# Altium PCB MB102_Upgrade.PcbDoc (part 2 of 2)
Units mil, origin at the board's own origin, x right, y up, seen from the top; angles counter-clockwise.
Board outline 2090.55 x 1299.23 mil, 2 copper layers (Top Layer, Bottom Layer), stack 65.792 mil thick; 81 components, 43 nets, 229 pads, 117 vias.
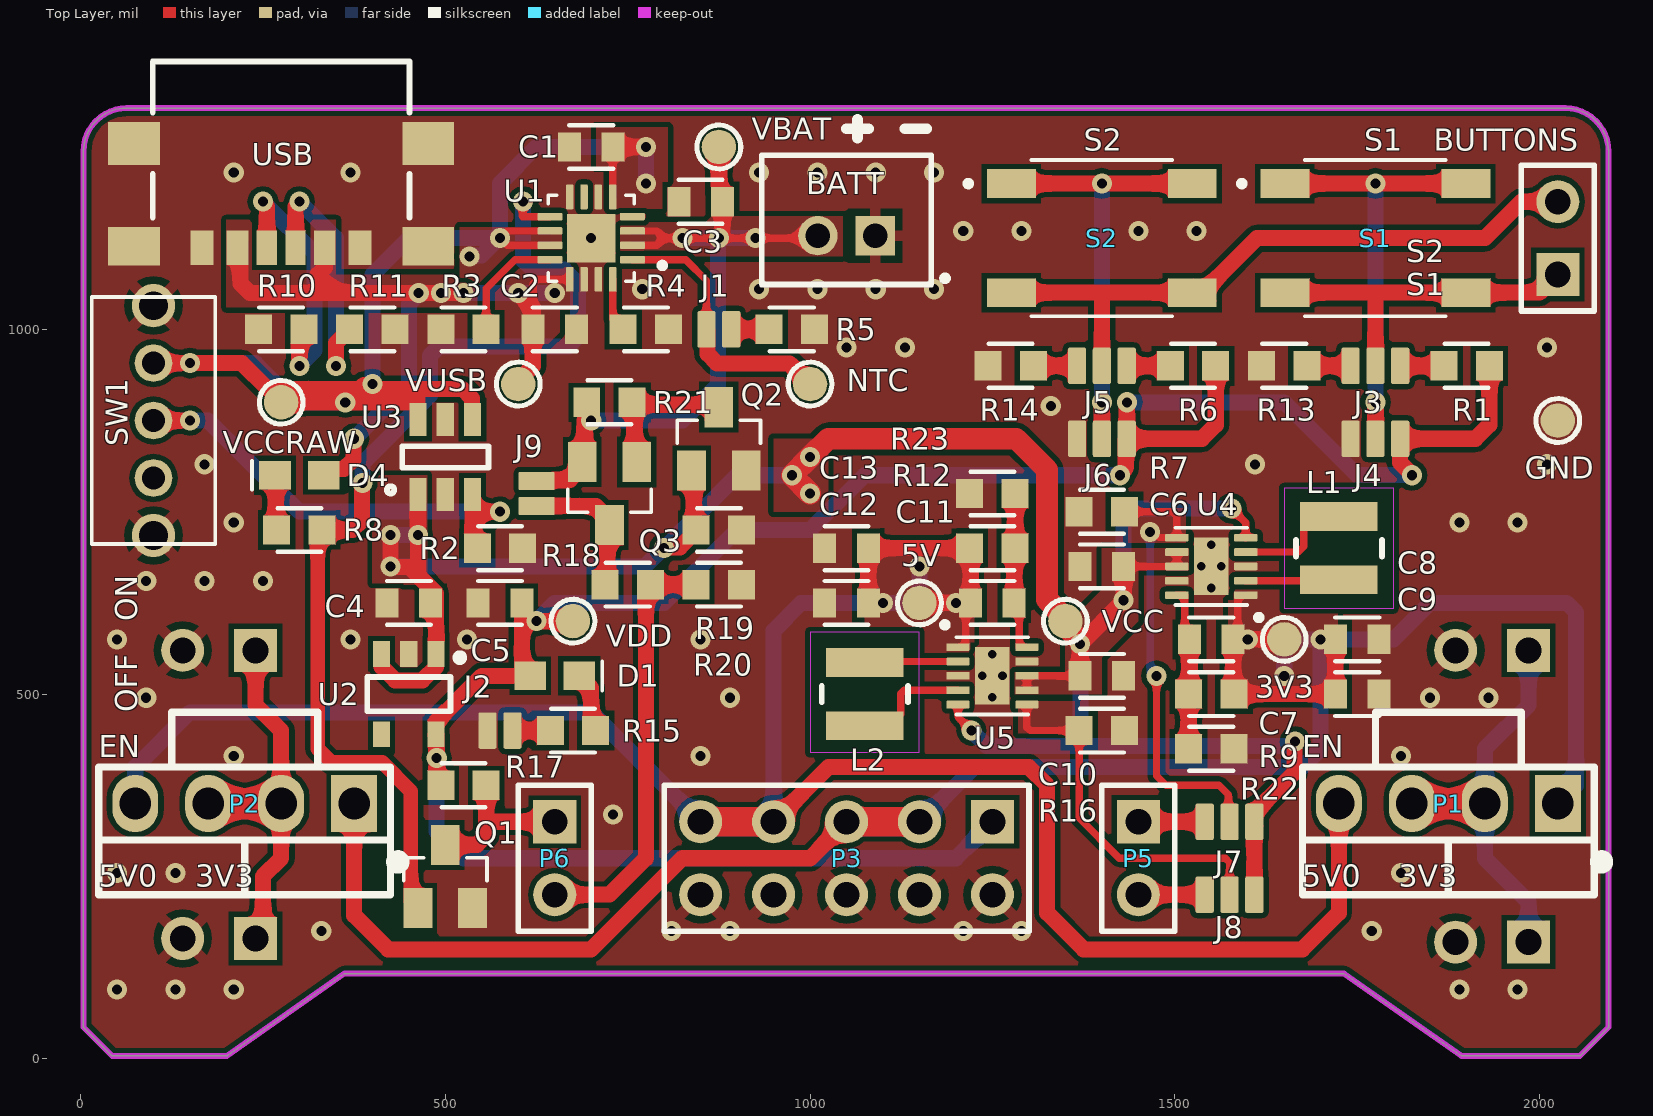
[diagram p0: Top Layer view]

## Via types
v1: diameter 27.56, hole 13.78, Top Layer to Bottom Layer, tented both sides, 109 vias
v2: diameter 19.68/19.68 (per signal layer), hole 11.81, Top Layer to Bottom Layer, 8 vias

## Nets (pads, with @x,y where several pads share a name; then routed paths per layer and width w, separated by ;. In a path a pad name is that pad's centre, name@x,y a point inside that pad or via, vN(x,y) a via of type N, cw(c..) or ccw(c..) an arc to the next point about the centre after c; other vN are vias at no path point) (continued)
VCC: (continued)
  Bottom Layer w22: v1(462.6,718.11) 462.54,718.17 425.06,718.17 v1(425,718.22) v1(425,675) 773.5,675 798.5,700 v1(800,700) 900,800 v1(975,800) ; v1(1000,775) v1(975,800) ; v1(1000,825) v1(975,800) ; v1(1221.22,450) 1242.22,429 1371,429 ; v1@1370.9,567.83 1370.9,429.1 1371,429 ; v1(1429.88,628.63) 1429.88,741.64 1442.77,754.53 v1(1577.76,754.53) ; v1(1665.03,434.97) 1663.52,434.97 1657.55,429 1371,429
VCCRAW: C1.1 SW1.1 U1.5 U1.10 U1.11 U3.4 U3.6 VCCRAW.1 | length 2219.6
  Top Layer w10: U1.11 584.84,1115.16 v1(575,1125) 584.84,1134.84 U1.10 ; U1.5 729.53,1249.65 C1.1
  Top Layer w22: SW1.1 v1(150,953.74) 221.26,953.74 256.78,918.22 382.72,918.22 ; VCCRAW.1 275.07,899.93 362.8,899.93 v1(362.86,899.87) v1@364.37,899.87 ; v1(400,925) 398.94,923.94 388.44,923.94 382.72,918.22 ; U3.6 461.79,876.99 461.79,906.43 ; U3.4 536.59,876.99 536.59,905.33 523.7,918.22 450,918.22 ; C1.1 v1(775,1250) ; v1@364.37,899.87 455.22,899.87 461.79,906.43 ; v1@364.37,899.87 382.72,918.22 ; 382.72,918.22 450,918.22 ; 450,918.22 461.79,906.43
  Bottom Layer w22: SW1.1 v1(150,953.74) 239.57,953.74 275.09,918.22 ; v1(532.98,1100) 534.05,1101.06 549.56,1101.06 v1@573.5,1125 ; v1(775,1200) v1(775,1250) 625,1250 575,1200 v1(575,1125) v1@573.5,1125 ; 275.09,918.22 v1@391.72,918.22 ; 275.09,918.22 293.45,899.87 v1(362.86,899.87) 363.93,900.93 374.43,900.93 v1@391.72,918.22 ; v1@391.72,918.22 398.5,925 v1(400,925) 400,1075 450,1125 v1@573.5,1125
VDD_RCT: C5.1 D1.1 J4.3 J6.3 P3.1 R1.2 R6.2 R17.2 U2.5 VDD.1 | length 3194.7
  Top Layer w22: U2.5@486.59,444.07 U2.5 ; R17.2 488.21,380.68 v1(488.21,412.38) 488.21,444.07 U2.5 ; 591.54,525 550,525 487.4,462.4 U2.5 ; C5.1 604.88,600 ; D1.1@617.72,526.18 D1.1 614.57,525 604.88,534.69 604.88,600 ; VDD.1 v1(625,600) 604.88,600 ; v1(1425,800) 1425,801.5 1432.5,809 1432.5,848.5 J6.3 ; v1(1434.56,900) 1434.28,899.72 1434.28,850.28 J6.3 ; R6.2 1556.1,868.99 1537.11,850 J6.3 ; v1(1825,800) 1825,801.31 1808.99,817.33 J4.3 1912.11,850 1931.1,868.99 R1.2
  Bottom Layer w22: v1(488.21,412.38) 488.21,311.79 525,275 1200,275 P3.1 ; v1(625,600) 650,625 800,625 900,725 1000,725 1075,800 v1(1425,800) ; v1(1434.56,900) 1650,900 1749.5,800.5 1824.5,800.5 v1(1825,800)
VUSB: C2.1 D4.1 U1.13 USB.A9 USB.B9 VUSB.1 | length 1186.8
  Top Layer w10: 620.12,1029.88 620.12,1062.65 625.98,1068.5 U1.13
  Top Layer w22: USB.A9@215.16,1121.89 219.12,1117.93 219.12,1062.89 232.01,1050 350,1050 ; D4.1 342.15,808.69 361.05,808.69 373.94,821.57 373.94,848.94 v1(375,850) ; USB.B9@334.84,1121.89 334.84,1084.84 325,1075 350,1050 ; v1(525,1050) v1(494.28,1050) v1(463.56,1050) 350,1050 ; VUSB.1 600,929.43 620.12,949.55 C2.1 620.12,1029.88 v1(600,1050)
  Bottom Layer w22: v1(375,850) 450,925 450,1034.94 463.56,1048.5 v1(463.56,1050) v1(494.28,1050) v1(525,1050) v1(600,1050) v1(650,1050)
pads on no net: SW1.3 U1.7 U2.4

## Polygon pours and split planes (outlines as drawn)
VBAT on Top Layer "VBAT_TOP" (solid, remove dead copper, pour order 6): 1045,1155 1045,1100 740,1100 740,1147.12 857.12,1147.12 865,1155
5V on Top Layer "5V_TOP" (solid, remove dead copper, pour order 21): 1225,556.78 1225,700 1075,700 1075,557.01
3V3 on Top Layer "3V_TOP" (solid, remove dead copper, pour order 22): 1573.23,643.22 1573.23,500 1723.23,500 1723.23,642.99
3V3_PWR_CTRL on Top Layer "3V3PWR_TOP" (solid, remove dead copper, pour order 20): 1515,705 1515,755 1436.31,755 1436.31,705
5V_PWR_CTRL on Top Layer "5VPWR_TOP" (solid, remove dead copper, pour order 19): 1362.72,446.33 1362.72,490.14 1285.35,490.14 1285.35,446.33
VCC on Top Layer "VCC_TOP6" (solid, remove dead copper, pour order 15): 1440,670 1440,700 1519.41,700 1519.41,670
VCC on Top Layer "VCC_TOP5" (solid, remove dead copper, pour order 9): 1276.52,500 1276.52,530 1350,530 1350,500
VCC on Top Layer "VCC_TOP5" (solid, remove dead copper, pour order 16): 1025,850 1025,750 950,750 950,850
VCC on Top Layer "VCC_TOP4" (solid, remove dead copper, pour order 14): 1350,500 1400,500 1400,550 1450,600 1450,700 1400,700 1400,643.17 1350,593.17
VCC on Top Layer "VCC_TOP3" (solid, remove dead copper, pour order 13): 475,800 475,650 400,650 400,800
VCCRAW on Top Layer "VCCRAW_TOP1" (solid, remove dead copper, pour order 11): 725,1165 805,1165 805,1195 805,1277.08 707.13,1277.08 707.13,1222.92 725,1222.92
VUSB on Top Layer "VUSB_TOP" (solid, remove dead copper, pour order 7): 200,1150 200,1030 550,1030 550,1075 350,1075 350,1150
VUSB on Top Layer "VUSB_TOP1" (solid, remove dead copper, pour order 8): 675,1085 675,1013.79 641.21,980 581.61,980 581.61,1027.08 567.32,1027.08 567.32,1052.32 600,1085
VCCRAW on Top Layer "VCCRAW_TOP" (solid, remove dead copper, pour order 2): 660,1140 660,1110 595.35,1110 545.35,1060 520,1060 520,1140
GND on Top Layer "GND_TOP" (solid, remove dead copper, pour order 23): 4,43.37 43.37,4 200.43,4 361.68,116.91 1731.86,116.91 1893.11,4 2055.18,4 2094.55,43.37 2094.55,1244.17 2094.57,1244.17 ccw(c2035.51,1244.17) 2035.51,1303.23 2035.51,1303.21 63.07,1303.21 63.07,1303.23 ccw(c63.07,1244.17) 4.02,1244.17 4,1244.17
VBAT on Bottom Layer "VBAT_TOP" (solid, remove dead copper, pour order 18): 1045,1155 1045,1100 740,1100 740,1147.12 857.12,1147.12 865,1155
5V on Bottom Layer "5V_TOP" (solid, remove dead copper, pour order 17): 1225,556.78 1225,700 1075,700 1075,557.01
3V3 on Bottom Layer "3V_TOP" (solid, remove dead copper, pour order 12): 1575,643.22 1575,500 1725,500 1725,642.99
VCC on Bottom Layer "VCC_BOT3" (solid, remove dead copper, pour order 10): 400,732.14 400,650 800,650 900,750 1075,750 1075,864.27 914.27,864.27 782.14,732.14
VCCRAW on Bottom Layer "VCCRAW_BOT2" (solid, remove dead copper, pour order 3): 550,1277.08 625,1277.08 625,1200 597.47,1172.47 597.47,1075 450,1075 425,1050 425,918.62 399.6,893.22 370,893.22 370,1095 430,1155 550,1155
VCCRAW on Bottom Layer "VCCRAW_BOT1" (solid, remove dead copper, pour order 0): 725,1165 805,1165 805,1195 805,1277.08 550,1277.08 550,1222.92 725,1222.92
VUSB on Bottom Layer "VUSB_BOT1" (solid, remove dead copper, pour order 5): 675,1085 675,1013.79 641.21,980 581.61,980 425,980 425,1085
GND on Bottom Layer "GND_BOT" (solid, remove dead copper, pour order 24): 4,43.37 43.37,4 200.43,4 361.68,116.91 1731.86,116.91 1893.11,4 2055.18,4 2094.55,43.37 2094.55,1244.17 2094.57,1244.17 ccw(c2035.51,1244.17) 2035.51,1303.23 2035.51,1303.21 63.07,1303.21 63.07,1303.23 ccw(c63.07,1244.17) 4.02,1244.17 4,1244.17

## Keep-outs
Top Layer:
  region: 1650,617.5 1800,617.5 1800,782.5 1650,782.5
  region: 1000,420 1150,420 1150,585 1000,585
Bottom Layer:
  region: 1650,617.5 1800,617.5 1800,782.5 1650,782.5
  region: 1000,420 1150,420 1150,585 1000,585
Keep-Out Layer:
  the board outline again, w8

## Silkscreen, mask and mechanical layers (free items; w line width, h text height)
Top Overlay:
  lines w10: 25,300 425,300 ; 125,400 125,475 225,475 325,475 325,400 ; 225,225 225,300 ; 1675,300 2075,300 ; 1775,400 1775,475 1875,475 1975,475 1975,400 ; 1875,225 1875,300 ; 25,225 425,225 425,400 25,400 25,225 ; 1675,225 1675,400 2075,400 2075,225 1675,225
  lines w15: 1050,1275 1080,1275 ; 1065,1262.5 1065,1287.5 ; 1130,1275 1160,1275
  text "S2 / S1" at 1817.26,1046.82 h30
  text "ON" at 77.89,600 h30 r90
  text "OFF" at 77.89,475 h30 r90
  text "EN" at 25,413.41 h30
  text "EN" at 1675,413.41 h30
  text "5V0    3V3" at 25,235.91 h30
  text "5V0    3V3" at 1675,235.91 h30
Bottom Overlay:
  lines w10: 800,500 1300,500 ; 900,400 900,600 ; 1000,400 1000,600 ; 1100,400 1100,600 ; 1200,400 1200,600 ; 800,400 800,600 1300,600 1300,400 800,400
  lines w15: 990,1190 1030,1190 ; 1010,1170 1010,1210 ; 1075,1190 1105,1190
  text "USB C / 5V" at 392.74,1169.41 h30
  text "S2 /  / S1" at 2067.74,1051.82 h30
  text "J1 (NTC)" at 901.94,976.01 h30
  text "ON" at 250,897.11 h30
  text "OFF" at 250,797.11 h30
  text "J5 (S2) / UP |S2| DOWN / J6 (S2) / UP |S2| DOWN" at 1583.19,786.53 h30
  text "J3 (S1) / UP |S1| DOWN / J4 (S1) / UP |S1| DOWN" at 1963.19,786.53 h30
  text "J9 (BATT)" at 631.94,726.91 h30
  text "GND" at 190,457.11 h25
  text "GND" at 1935,457.11 h25
  text "J2 (LED)" at 601.94,426.01 h30
  text "VDD 3V3 3V3 5V0 5V0 /  / GND GND GND GND GND" at 1300,394.22 h25
  text "J7 (3V3) / ON |3V| CTRL / J8 (5V) / ON |5V| CTRL" at 1711.94,359.03 h30
  text "GND" at 190,212.11 h25
  text "GND" at 1935,212.11 h25
  text "BATT_STATUS / BATT_ADC" at 610,139.22 h30
  text "CTRL_3V3 / CTRL_5V" at 1835.9,139.22 h30
  text "MB102_UPGRADE_V01" at 1357.9,124.51 h30
DXF (Mech8):
  lines w8: 63.07,1303.21 2035.51,1303.21 ; 63.07,1303.23 ccw(c63.07,1244.17) 4.02,1244.17 4,43.37 43.37,4 200.43,4 361.68,116.91 1731.86,116.91 1893.11,4 2055.18,4 2094.55,43.37 2094.55,1244.17 ccw(c2035.51,1244.17) 2035.51,1303.23 ; 126.64,154 126.64,179.2 151.83,179.2 151.83,154 126.64,154 ; 126.64,547.7 151.83,547.7 151.83,572.9 126.64,572.9 126.64,547.7 ; 226.64,154 226.64,179.2 251.83,179.2 251.83,154 226.64,154 ; 226.64,547.7 251.83,547.7 251.83,572.9 226.64,572.9 226.64,547.7 ; 1872.31,147.7 1897.5,147.7 1897.5,172.9 1872.31,172.9 1872.31,147.7 ; 1872.31,547.7 1897.5,547.7 1897.5,572.9 1872.31,572.9 1872.31,547.7 ; 1972.31,147.7 1972.31,172.9 1997.5,172.9 1997.5,147.7 1972.31,147.7 ; 1972.31,547.7 1997.5,547.7 1997.5,572.9 1972.31,572.9 1972.31,547.7